# Altium PCB Mother_board00.PcbDoc
Units mm, origin at the board's own origin, x right, y up, seen from the top; angles counter-clockwise.
Board outline 169.08 x 144.64 mm, 2 copper layers (Top Layer, Bottom Layer); 57 components, 65 nets, 313 pads, 0 vias.
Unrouted connection lines stored in the file: 88.
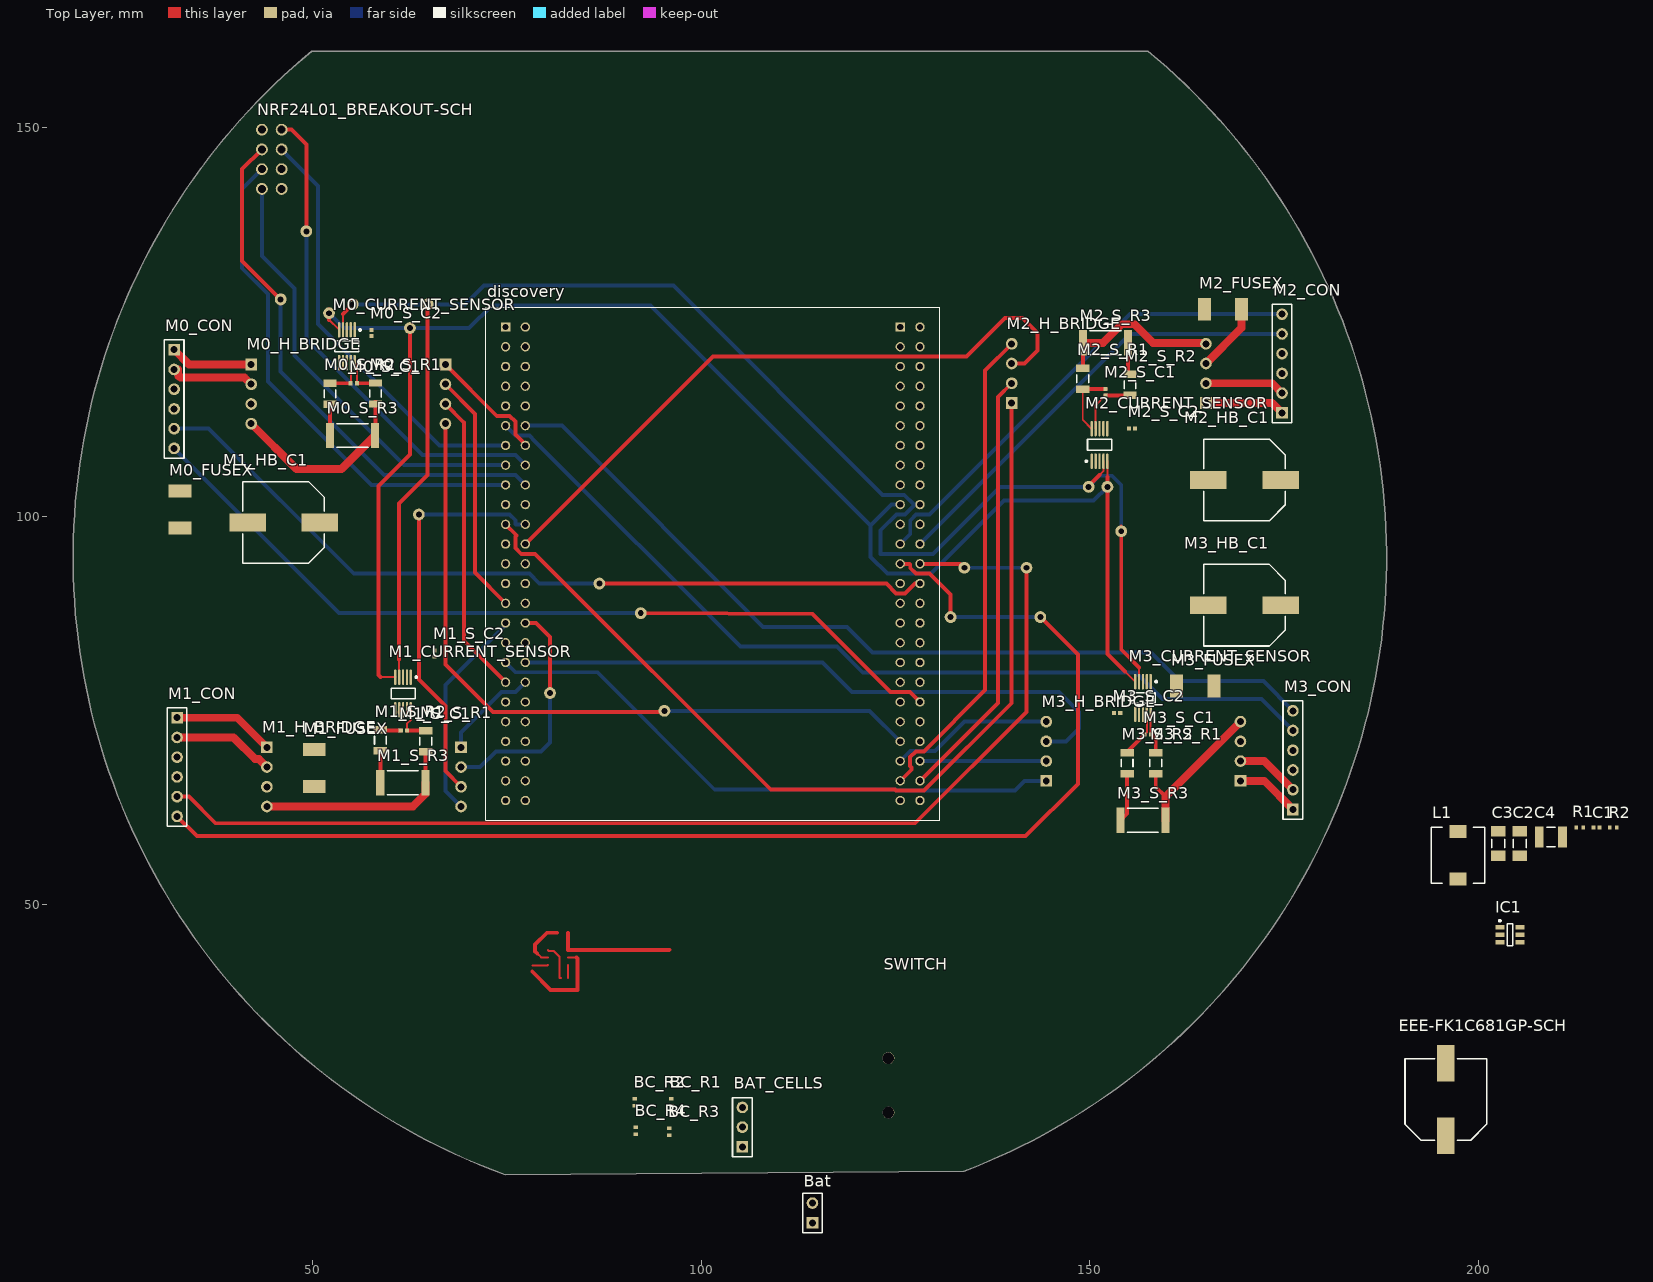
[diagram p0: Top Layer view]
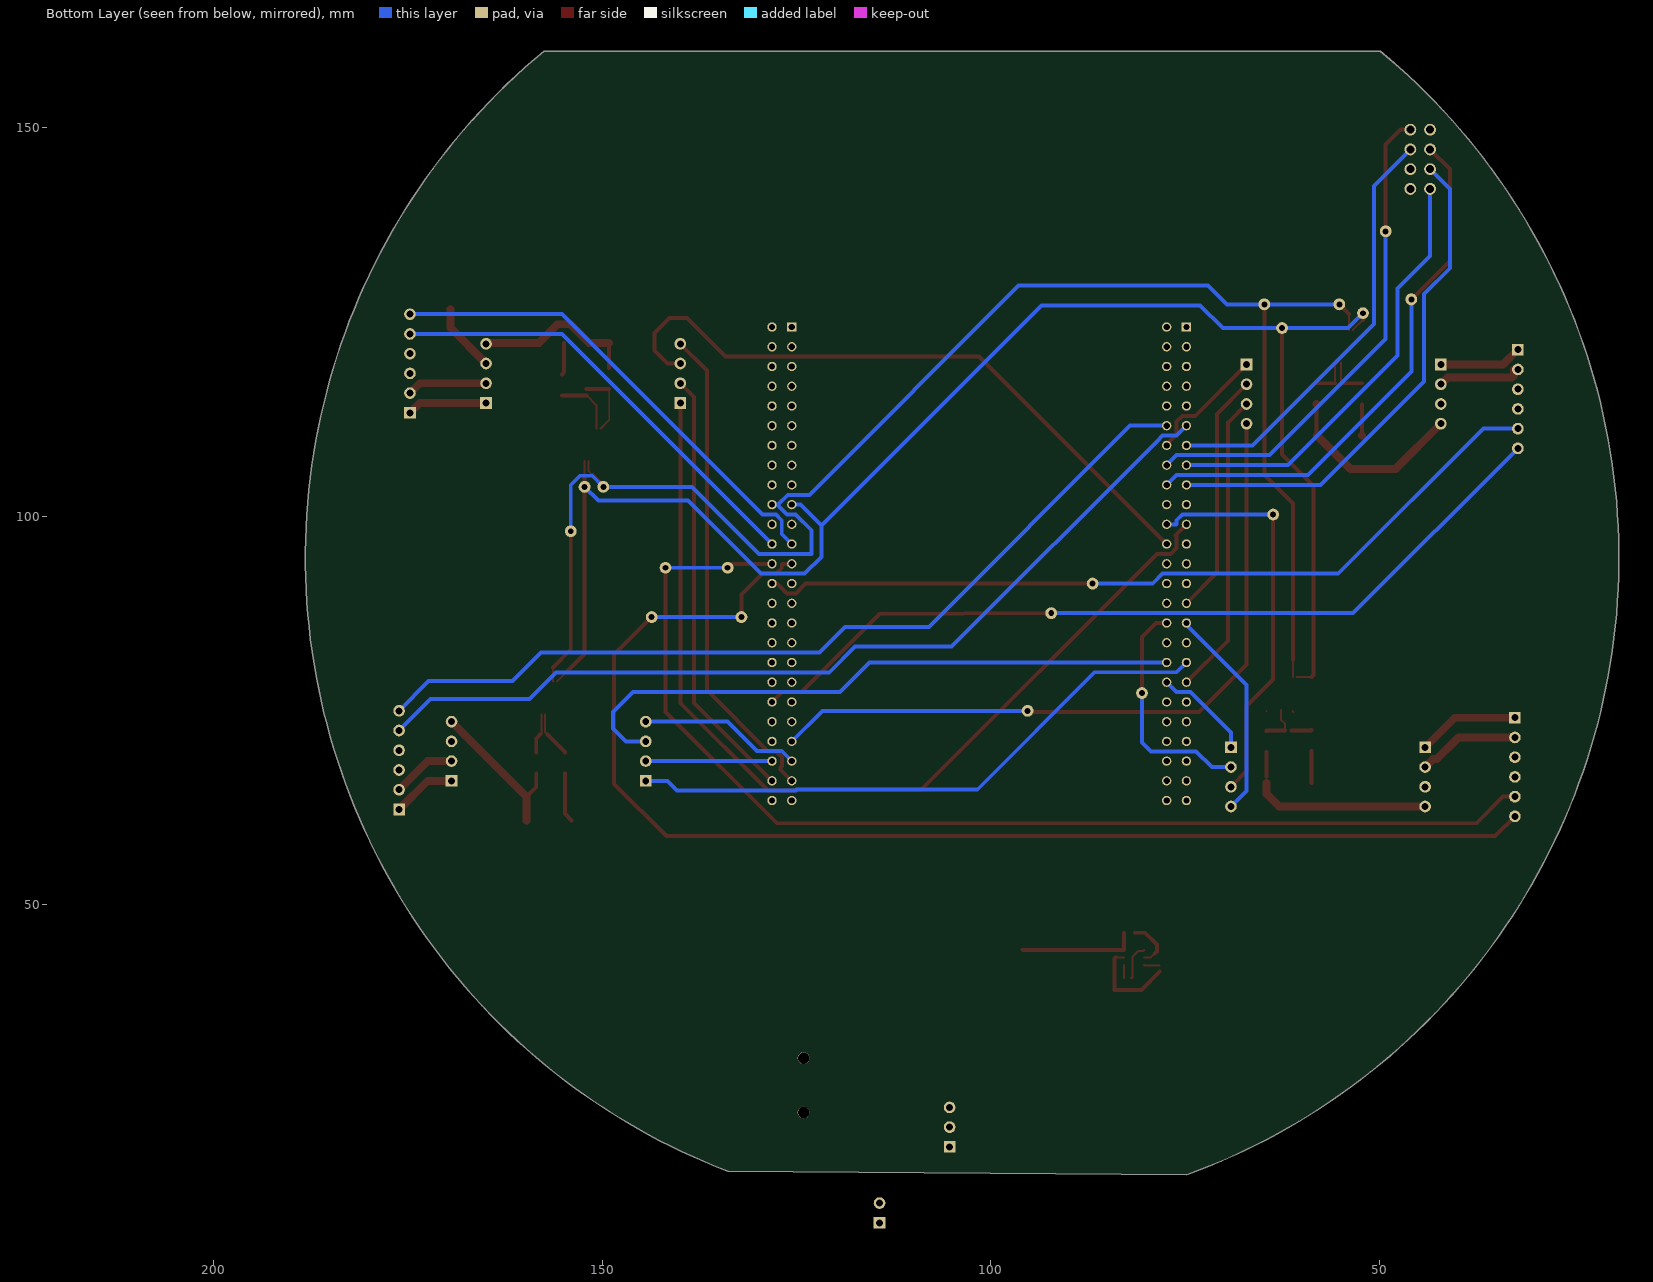
[diagram p1: Bottom Layer view, seen from below]

## Layer stack, top to bottom
Top Solder: solder mask 0.0102, Solder Resist, Dk 3.5
Top Layer: signal copper 0.0356
Dielectric 1: dielectric 0.32, FR-4, Dk 4.8
Bottom Layer: signal copper 0.0356
Bottom Solder: solder mask 0.0102, Solder Resist, Dk 3.5

## Board outline
74.759,15.203 cw(c103.671,94.651) 49.846,159.848 157.496,159.848 cw(c103.671,94.651) 133.831,15.669

## Design rules (kind name [scope] priority, off if disabled: settings)
Clearance Clearance_1 [All] p1: gap=0.4
PolygonConnect "Schematic Polygon Connect Style_3" [InComponent('C2')] p1: connectstyle=Direct reliefconductorwidth=0.254 reliefentries=4 polygonreliefangle="45 Angle" airgapwidth=0.254
PolygonConnect "Schematic Polygon Connect Style_2" [InComponent('C3')] p2: connectstyle=Direct reliefconductorwidth=0.254 reliefentries=4 polygonreliefangle="45 Angle" airgapwidth=0.254
PolygonConnect "Schematic Polygon Connect Style" [InComponent('L1')] p3: connectstyle=Direct reliefconductorwidth=0.254 reliefentries=4 polygonreliefangle="45 Angle" airgapwidth=0.254
PolygonConnect [All] p4: connectstyle=Relief reliefconductorwidth=0.254 reliefentries=4 polygonreliefangle="90 Angle" airgapwidth=0.254
RoutingVias [All] p1: holewidth=0.711 width=1.27 viastyle="Through Hole" minholewidth=0.711 minwidth=1.27 maxholewidth=0.711 maxwidth=1.27
SolderMaskExpansion [All] p1: expansion=0.102
Width [All] p1: maxlimit=1.016 minlimit=0.254 preferedwidth=0.508
30 further rules are at their usual default settings.

## Classes and differential pairs
component class Mother_board1: discovery
component class Mother_board2: EEE-FK1C681GP-SCH M0_CON M0_CURRENT_SENSOR M0_FUSEX M0_H_BRIDGE M0_S_C1 M0_S_C2 M0_S_R1 M0_S_R2 M0_S_R3 M1_CON M1_CURRENT_SENSOR M1_FUSEX M1_H_BRIDGE M1_HB_C1 M1_S_C1 M1_S_C2 M1_S_R1 M1_S_R2 M1_S_R3 M2_CON M2_CURRENT_SENSOR M2_FUSEX M2_H_BRIDGE M2_HB_C1 M2_S_C1 M2_S_C2 M2_S_R1 M2_S_R2 M2_S_R3 M3_CON M3_CURRENT_SENSOR M3_FUSEX M3_H_BRIDGE M3_HB_C1 M3_S_C1 M3_S_C2 M3_S_R1 M3_S_R2 M3_S_R3
component class Mother_board3: Bat BAT_CELLS BC_R1 BC_R2 BC_R3 BC_R4 C1 C2 C3 C4 IC1 L1 R1 R2 SWITCH
component class Mother_board4: NRF24L01_BREAKOUT-SCH
net class DIRECT: NetC1_2

## Components (designator, comment, footprint, x,y, rotation, side; value= is the part's Value field where it differs from the comment)
Bat "Battery connector" HDR1X2 114.3,9.017 r90 top
BAT_CELLS "Battery cells connector" HDR1X3 105.283,18.796 r90 top
BC_R1 "R0402-10K" 0402-RES-HD 96.139,24.569 r270 top
BC_R2 "R0402-10K" 0402-RES-HD 91.44,24.569 r90 top
BC_R3 "R0402-10K" 0402-RES-HD 95.885,20.77 r90 top
BC_R4 "R0402-10K" 0402-RES-HD 91.567,20.897 r90 top
C1 "100nF" 0402-CAP 215.229,59.9 r0 top
C2 "22uF" 1206-CAP 205.355,57.85 r90 top
C3 "22uF" 1206-CAP 202.597,57.85 r90 top
C4 "10uF" PCBComponent#1 209.363,58.7 r0 top
discovery "STM32F407G-DISC1" PCBComponent#2 101.473,93.853 r0 top
EEE-FK1C681GP-SCH "680UF/16V" EEE-FK1C681GP 195.834,24.892 r90 top
IC1 "TPS563200DDCT" SOT95P280X110-6N 204.089,46.101 r0 top
L1 "CLF7045T-4R7N-H" CLF7045T 197.383,56.323 r0 top
M0_CON "Header 6" HDR1X6 32.131,121.412 r270 top
M0_CURRENT_SENSOR "INA220BIDGST" TSSOP10 54.372,121.861 r270 top
M0_FUSEX "MF-MSMF250/16X" RESC4632X16N 32.893,100.861 r90 top
M0_H_BRIDGE "H_BRIDGE_BREAKOUT" H_BRIDGE_BREAKOUT 54.864,115.57 r180 top
M0_S_C1 "CC0402-1uF" 0402-CAP 55.264,117.094 r180 top
M0_S_C2 "CC0402-100nF" 0402-CAP 57.531,123.552 r90 top
M0_S_R1 "R1206-10R" 1206-RES-HD 58.039,115.777 r270 top
M0_S_R2 "R1206-10R" 1206-RES-HD 52.197,115.744 r270 top
M0_S_R3 "R2512-0R02" 2512-RES-HD 55.097,110.363 r0 top
M1_CON "Header 6" HDR1X6 32.512,74.041 r270 top
M1_CURRENT_SENSOR "INA220BIDGST" TSSOP10 61.603,77.157 r270 top
M1_FUSEX "MF-MSMF250/16X" RESC4632X16N 50.165,67.564 r270 top
M1_H_BRIDGE "H_BRIDGE_BREAKOUT" H_BRIDGE_BREAKOUT 56.877,66.294 r180 top
M1_HB_C1 "680UF/16V" EEE-FK1C681GP 46.228,99.187 r180 top
M1_S_C1 "CC0402-1uF" 0402-CAP 61.703,72.39 r180 top
M1_S_C2 "CC0402-100nF" 0402-CAP 65.659,82.315 r90 top
M1_S_R1 "R1206-10R" 1206-RES-HD 64.516,70.993 r270 top
M1_S_R2 "R1206-10R" 1206-RES-HD 58.674,71.12 r90 top
M1_S_R3 "R2512-0R02" 2512-RES-HD 61.574,65.659 r0 top
M2_CON "Header 6" HDR1X6 174.752,113.284 r90 top
M2_CURRENT_SENSOR "INA220BIDGST" TSSOP10 151.257,109.161 r90 top
M2_FUSEX "MF-MSMF250/16X" RESC4632X16N 167.155,126.619 r0 top
M2_H_BRIDGE "H_BRIDGE_BREAKOUT" H_BRIDGE_BREAKOUT 152.146,118.491 r0 top
M2_HB_C1 "680UF/16V" EEE-FK1C681GP 169.926,104.648 r180 top
M2_S_C1 "CC0402-1uF" 0402-CAP 152.019,115.932 r270 top
M2_S_C2 "CC0402-100nF" 0402-CAP 155.429,111.252 r0 top
M2_S_R1 "R1206-10R" 1206-RES-HD 149.098,117.682 r90 top
M2_S_R2 "R1206-10R" 1206-RES-HD 155.194,116.887 r90 top
M2_S_R3 "R2512-0R02" 2512-RES-HD 152.019,122.301 r180 top
M3_CON "Header 6" HDR1X6 176.149,62.23 r90 top
M3_CURRENT_SENSOR "INA220BIDGST" TSSOP10 156.845,76.581 r270 top
M3_FUSEX "MF-MSMF250/16X" RESC4632X16N 163.576,78.105 r0 top
M3_H_BRIDGE "H_BRIDGE_BREAKOUT" H_BRIDGE_BREAKOUT 156.591,69.85 r0 top
M3_HB_C1 "680UF/16V" EEE-FK1C681GP 169.926,88.519 r180 top
M3_S_C1 "CC0402-1uF" 0402-CAP 157.461,71.882 r180 top
M3_S_C2 "CC0402-100nF" 0402-CAP 153.524,74.676 r180 top
M3_S_R1 "R1206-10R" 1206-RES-HD 158.496,68.199 r270 top
M3_S_R2 "R1206-10R" 1206-RES-HD 154.813,68.199 r270 top
M3_S_R3 "R2512-0R02" 2512-RES-HD 156.845,60.833 r0 top
NRF24L01_BREAKOUT-SCH "NRF24l01_BREAKOUT-SCH" NRF24L01_BREAKOUT-PCB 45.974,144.653 r270 top
R1 "33K" 0402-RES-HD 213.071,59.9 r180 top
R2 "10K" 0402-RES-HD 217.387,59.9 r0 top
SWITCH "R1966AB" PCBComponent#3 134.62,29.591 r0 top

## Footprints (in the part's own frame and the unit in brackets; to place one, negate y for a bottom-side part, rotate by r counter-clockwise, add the part's x,y. Pads: shape width x height; smd on the part's side, far side on the other; paste and mask are expansions set on the pad)
0402-CAP [mm] "Chip Capacitor, Body 1.0x0.5mm, Height 0.6mm, IPC Medium Density"
  rect 0.52x0.52 smd: 1(-0.4,0) 2(0.4,0)
  body extent -0.55,-0.3 0.55,0.3, height 0.33
0402-RES-HD [mm] "Chip Resistor, Body 1.0x0.5mm, IPC High Density"
  rect 0.45x0.55 smd: 1(-0.45,0) 2(0.45,0)
  body extent -0.52,-0.27 0.53,0.28, height 0.4
1206-CAP [mm] "Chip Capacitor, Body 3.2x1.6mm, Height 1.7mm, IPC Low Density"
  rect 1.35x1.9 smd: 1(-1.6,0) 2(1.6,0)
  silkscreen extent -0.55,-0.85 0.55,0.85, body extent -1.7,-0.9 1.7,0.9, height 1.7
1206-RES-HD [mm] "Chip Resistor, Body 3.2x1.6mm, IPC High Density"
  rect 0.95x1.7 smd: 1(-1.35,0) 2(1.35,0)
  silkscreen extent -0.5,-0.75 0.5,0.75, body extent -1.67,-0.87 1.67,0.87, height 0.75
2512-RES-HD [mm] "Chip Resistor, Body 6.4x3.2mm, IPC High Density"
  rect 1.05x3.25 smd: 1(-2.9,0) 2(2.9,0)
  silkscreen extent -2,-1.52 2,1.53, body extent -3.25,-1.7 3.25,1.7, height 0.75
CLF7045T [mm]
  rect 2.2x1.7 smd: 1(0,3.05) 2(0,-3.05)
  silkscreen extent -3.45,-3.6 3.45,3.6, body extent -3.5,-3.6 3.5,3.6, height 4.51
EEE-FK1C681GP [mm] "Aluminum Electrolytic Capacitor, Body 10,30x10,30x10,50mm, IPC Low Density"
  rect 4.7x2.3 smd: 1(-4.65,0) 2(4.65,0)
  silkscreen extent -5.25,-5.25 5.25,5.25, body extent -5.25,-5.25 5.25,5.25, height 10.5
H_BRIDGE_BREAKOUT [mm]
  round 1.5 hole 0.9: 0(-12.192,3.683) 1(-12.192,1.143) 2(-12.192,-1.397) 4(12.808,3.683) 5(12.808,1.143) 6(12.808,-1.397)
  rect 1.5x1.5 hole 0.9: 3(-12.192,-3.937) 7(12.808,-3.937)
HDR1X2 [mm] "Connector; Header; 2 Position"
  rect 1.5x1.5 hole 0.9: 1(0,0)
  round 1.5 hole 0.9: 2(2.54,0)
  silkscreen extent -1.27,-1.27 3.81,1.27
HDR1X3 [mm] "Connector; Header; 3 Position"
  rect 1.5x1.5 hole 0.9: 1(0,0)
  round 1.5 hole 0.9: 2(2.54,0) 3(5.08,0)
  silkscreen extent -1.27,-1.27 6.35,1.27
HDR1X6 [mm] "Connector; Header; 6 Position"
  rect 1.5x1.5 hole 0.9: 1(0,0)
  round 1.5 hole 0.9: 2(2.54,0) 3(5.08,0) 4(7.62,0) 5(10.16,0) 6(12.7,0)
  silkscreen extent -1.27,-1.27 13.97,1.27
NRF24L01_BREAKOUT-PCB [mil]
  round 60 hole 40.16: 0(100,0) 1(0,0) 2(-100,0) 3(-200,0) 4(100,-100) 5(0,-100) 6(-100,-100) 7(-200,-100)
PCBComponent#1 [mm]
  rect 1.15x2.7 smd: 1(-1.5,0) 2(1.5,0)
  silkscreen extent -0.55,-1.25 0.55,1.25, body extent -1.7,-1.4 1.7,1.4, height 2.8
PCBComponent#2 [mm]
  rect 1.2x1.2 hole 0.8: P$1(-26.67,30.48) P$51(24.13,30.48)
  round 1.2 hole 0.8: P$2(-24.13,30.48) P$3(-26.67,27.94) P$4(-24.13,27.94) P$5(-26.67,25.4) P$6(-24.13,25.4) P$7(-26.67,22.86) P$8(-24.13,22.86) P$9(-26.67,20.32) P$10(-24.13,20.32) P$11(-26.67,17.78) P$12(-24.13,17.78) P$13(-26.67,15.24) P$14(-24.13,15.24) P$15(-26.67,12.7) P$16(-24.13,12.7) P$17(-26.67,10.16) P$18(-24.13,10.16) P$19(-26.67,7.62) P$20(-24.13,7.62) P$21(-26.67,5.08) P$22(-24.13,5.08) P$23(-26.67,2.54) P$24(-24.13,2.54) P$25(-26.67,0) P$26(-24.13,0) P$27(-26.67,-2.54) P$28(-24.13,-2.54) P$29(-26.67,-5.08) P$30(-24.13,-5.08) P$31(-26.67,-7.62) P$32(-24.13,-7.62) P$33(-26.67,-10.16) P$34(-24.13,-10.16) P$35(-26.67,-12.7) P$36(-24.13,-12.7) P$37(-26.67,-15.24) P$38(-24.13,-15.24) P$39(-26.67,-17.78) P$40(-24.13,-17.78) P$41(-26.67,-20.32) P$42(-24.13,-20.32) P$43(-26.67,-22.86) P$44(-24.13,-22.86) P$45(-26.67,-25.4) P$46(-24.13,-25.4) P$47(-26.67,-27.94) P$48(-24.13,-27.94) P$49(-26.67,-30.48) P$50(-24.13,-30.48) P$52(26.67,30.48) P$53(24.13,27.94) P$54(26.67,27.94) P$55(24.13,25.4) P$56(26.67,25.4) P$57(24.13,22.86) P$58(26.67,22.86) P$59(24.13,20.32) P$60(26.67,20.32) P$61(24.13,17.78) P$62(26.67,17.78) P$63(24.13,15.24) P$64(26.67,15.24) P$65(24.13,12.7) P$66(26.67,12.7) P$67(24.13,10.16) P$68(26.67,10.16) P$69(24.13,7.62) P$70(26.67,7.62) P$71(24.13,5.08) P$72(26.67,5.08) P$73(24.13,2.54) P$74(26.67,2.54) P$75(24.13,0) P$76(26.67,0) P$77(24.13,-2.54) P$78(26.67,-2.54) P$79(24.13,-5.08) P$80(26.67,-5.08) P$81(24.13,-7.62) P$82(26.67,-7.62) P$83(24.13,-10.16) P$84(26.67,-10.16) P$85(24.13,-12.7) P$86(26.67,-12.7) P$87(24.13,-15.24) P$88(26.67,-15.24) P$89(24.13,-17.78) P$90(26.67,-17.78) P$91(24.13,-20.32) P$92(26.67,-20.32) P$93(24.13,-22.86) P$94(26.67,-22.86) P$95(24.13,-25.4) P$96(26.67,-25.4) P$97(24.13,-27.94) P$98(26.67,-27.94) P$99(24.13,-30.48) P$100(26.67,-30.48)
  silkscreen extent -29.21,-33.02 29.21,33.02
PCBComponent#3 [mm]
  round 1.524 hole 1.5 paste+0: 0(-10.541,-6.375)
  round 1.524 hole 1.5: 1(-10.541,0.625)
  body extent -11.13,-9.71 11.37,11.23, height 7.4
RESC4632X16N [mm] "Chip Resistor, 2-Leads, Body 4,60x3,24mm, IPC Medium Density"
  rect 1.68x2.95 smd: 1(-2.39,0) 2(2.39,0)
  body extent -2.3,-1.62 2.3,1.62, height 1.15
SOT95P280X110-6N [mm] "SOT23, 6-Leads, Body 2,90x2,80mm, Pitch 0,95mm, IPC Medium Density"
  rect 1.15x0.6 smd: 1(-1.3,0.95) 2(-1.3,0) 3(-1.3,-0.95) 4(1.3,-0.95) 5(1.3,0) 6(1.3,0.95)
  silkscreen extent -1.42,-1.4 0.35,1.92, body extent -0.72,-1.37 0.72,1.38, height 1.1
TSSOP10 [mm] "TSSOP, 10-Leads, Body 3x3mm, Pitch 0.5mm, IPC Low Density"
  oval 2x0.3 smd: 1(-2.1,1) 2(-2.1,0.5) 3(-2.1,0) 4(-2.1,-0.5) 5(-2.1,-1) 6(2.1,-1) 7(2.1,-0.5) 8(2.1,0) 9(2.1,0.5) 10(2.1,1)
  silkscreen extent -2.22,-1.55 0.7,1.83, body extent -1.55,-1.55 1.55,1.55, height 1.1

## Part data
Bat: library part "Header 2", "Header, 2-Pin"
BAT_CELLS: library part "Header 3", "Header, 3-Pin"
BC_R1 BC_R2 BC_R3 BC_R4 R2: library part R0402-10K-10, "RES 10K OHM 1/10W 1% 0402 SMD"
C1: library part CC0402-100nF-50v-A.3, "CAP CER 0.1UF 50V 10% X7R 0402"
C2 C3: library part CC1206-22uF-6.3V-1, "CAP CER 22UF 6.3V 20% X5R 1206"
C4: library part CC1210-10uF-2, "CAP CER 10UF 50V 20% X5R 1210"
discovery: library part "BREAKOUT STM32F4DISCOVERY-01.A.1", "EVAL KIT STM32F DISCOVERY"
EEE-FK1C681GP-SCH M1_HB_C1 M2_HB_C1 M3_HB_C1: library part EEE-FK1C681GP-SCH, "Aluminum Electrolytic Capacitors - SMD Al Lytic Cap SMT FK Series 105C"
IC1: library part TPS563200DDCT-01.A.2, "IC REG BUCK ADJ 3A SYNC 6SOT"
L1: library part CLF7045T-4R7N-H-2, "FIXED IND 4.7UH 4.1A 20 MOHM SMD"
M0_CON M1_CON M2_CON M3_CON: "Header, 6-Pin"
M0_CURRENT_SENSOR M1_CURRENT_SENSOR M2_CURRENT_SENSOR M3_CURRENT_SENSOR: library part INA220BIDGST-3, "IC MONITOR PWR/CURR BIDIR 10MSOP"
M0_FUSEX M1_FUSEX M2_FUSEX M3_FUSEX: library part MF-MSMF250/16X-01.A.1, "PTC RESETTABLE .30A 30V 1812"
M0_H_BRIDGE M1_H_BRIDGE M2_H_BRIDGE M3_H_BRIDGE: library part H_BRIDGE_BREAKOUT-SCH
M0_S_C1 M1_S_C1 M2_S_C1 M3_S_C1: library part CC0402-1uF-5, "CAP CER 1UF 6.3V 10% X5R 0402"
M0_S_C2 M1_S_C2 M2_S_C2 M3_S_C2: library part CC0402-100nF-A.12, "CAP CER 0.1UF 10V 20% X5R 0402"
M0_S_R1 M0_S_R2 M1_S_R1 M1_S_R2 M2_S_R1 M2_S_R2 M3_S_R1 M3_S_R2: library part R1206-10R-1, "RES SMD 10 OHM 5% 2/3W 1206"
M0_S_R3 M1_S_R3 M2_S_R3 M3_S_R3: library part R2512-0R02-4, "RES .02 OHM 2W 1% 2512 SMD"
R1: library part R0402-33K-7, "RES 33K OHM 1/10W 1% 0402 SMD"
SWITCH: library part "E-Switch R1966ABLKBLKFR-01.A.2", "SWITCH ROCKER SPST 15A 125V"

## Free pads (board coordinates)
  round 1.524 hole 0.762: 3(152.273,103.759) 5(149.86,103.759) 18(154.051,98.044) 19(86.868,91.313) 21(95.25,74.93) 22(63.627,100.197) 24(80.518,77.216) 25(92.202,87.503) 26(143.637,86.995) 29(132.08,86.995) 30(141.859,93.345) 31(133.858,93.345) 34(52.07,126.111) 35(55.118,127.254) 38(64.77,127.254) 39(62.484,124.206) 40(45.847,127.889) 41(49.149,136.652)

## Nets (pads, with @x,y where several pads share a name; then routed paths per layer and width w, separated by ;. In a path a pad name is that pad's centre, name@x,y a point inside that pad or via, vN(x,y) a via of type N, cw(c..) or ccw(c..) an arc to the next point about the centre after c; other vN are vias at no path point)
GND: Bat.1 BAT_CELLS.3 BC_R3.2 BC_R4.1 C2.1 C3.1 C4.1 discovery.P$1 discovery.P$2 discovery.P$51 discovery.P$52 EEE-FK1C681GP-SCH.2 IC1.1 M0_CON.3 M0_CURRENT_SENSOR.1 M0_CURRENT_SENSOR.2 M0_CURRENT_SENSOR.7 M0_S_C2.2 M0_S_R2.2 M0_S_R3.1 M1_CON.3 M1_CURRENT_SENSOR.2 M1_CURRENT_SENSOR.7 M1_HB_C1.1 M1_S_C2.2 M1_S_R2.2 M1_S_R3.1 M2_CON.3 M2_CURRENT_SENSOR.1 M2_CURRENT_SENSOR.7 M2_HB_C1.1 M2_S_C2.2 M2_S_R2.2 M2_S_R3.1 M3_CON.3 M3_CURRENT_SENSOR.7 M3_HB_C1.1 M3_S_C2.2 M3_S_R2.2 M3_S_R3.1 NRF24L01_BREAKOUT-SCH.0 R2.1 | length 18.7
  Top Layer w0.508: M0_S_R3.1 M0_S_R2.2 ; M1_S_R3.1 58.674,69.77 ; M3_S_R3.1 154.813,61.701 M3_S_R2.2 ; M2_S_R3.1 154.919,118.512 M2_S_R2.2
NetBAT_CELLS_1: BAT_CELLS.1 BC_R2.1
NetBAT_CELLS_2: BAT_CELLS.2 BC_R1.1
NetBC_R1_2: BC_R1.2 BC_R3.1 discovery.P$8
NetBC_R2_2: BC_R2.2 BC_R4.2 discovery.P$7
NetC1_2: C1.2 IC1.2 L1.1
NetC4_2: C4.2 EEE-FK1C681GP-SCH.1 IC1.3 M0_CURRENT_SENSOR.8 M0_FUSEX.1 M1_CURRENT_SENSOR.8 M1_FUSEX.1 M2_CURRENT_SENSOR.8 M2_FUSEX.1 M3_CURRENT_SENSOR.8 M3_FUSEX.1 | length 15.3
  Top Layer w0.508: 82.804,46.355 82.834,46.325 82.834,44.13 95.843,44.13 95.885,44.172
Netdiscovery_P$11: discovery.P$11 M3_CON.5 | length 117.6
  Bottom Layer w0.508: discovery.P$11 76.089,110.347 76.099,110.357 77.867,110.357 78.607,109.617 78.607,109.602 105.025,83.185 117.475,83.185 120.777,79.883 155.956,79.883 159.385,76.454 172.085,76.454 M3_CON.5
Netdiscovery_P$12: discovery.P$12 M3_CON.6 | length 114
  Bottom Layer w0.508: discovery.P$12 82.042,111.633 107.95,85.725 118.745,85.725 122.047,82.423 157.861,82.423 161.544,78.74 172.339,78.74 M3_CON.6
Netdiscovery_P$13: discovery.P$13 NRF24L01_BREAKOUT-SCH.2 | length 55
  Bottom Layer w0.508: NRF24L01_BREAKOUT-SCH.2 50.654,142.513 50.654,124.733 66.294,109.093 discovery.P$13
Netdiscovery_P$14: discovery.P$14 M0_H_BRIDGE.3 | length 15.6
  Top Layer w0.508: M0_H_BRIDGE.3 73.666,112.897 75.327,112.897 76.067,112.157 76.067,110.496 77.343,109.22 discovery.P$14
Netdiscovery_P$15: discovery.P$15 NRF24L01_BREAKOUT-SCH.4 | length 56.2
  Bottom Layer w0.508: NRF24L01_BREAKOUT-SCH.4 43.434,133.477 47.625,129.286 47.625,120.65 61.722,106.553 discovery.P$15
Netdiscovery_P$16: discovery.P$16 NRF24L01_BREAKOUT-SCH.3 pad.41 | length 64.4
  Top Layer w0.508: NRF24L01_BREAKOUT-SCH.3 47.244,149.733 49.149,147.828 pad.41
  Bottom Layer w0.508: pad.41@49.149,137.16 pad.41 49.149,122.809 64.119,107.839 76.057,107.839 discovery.P$16
Netdiscovery_P$17: discovery.P$17 NRF24L01_BREAKOUT-SCH.5 | length 65.9
  Bottom Layer w0.508: NRF24L01_BREAKOUT-SCH.5 40.894,142.113 40.894,131.902 44.196,128.6 44.196,117.348 57.531,104.013 discovery.P$17
Netdiscovery_P$18: discovery.P$18 NRF24L01_BREAKOUT-SCH.6 pad.40 | length 69.7
  Top Layer w0.508: NRF24L01_BREAKOUT-SCH.6 40.894,144.653 40.894,132.842 pad.40
  Bottom Layer w0.508: pad.40@45.847,128.397 pad.40 45.847,118.618 59.166,105.299 76.057,105.299 discovery.P$18
Netdiscovery_P$21: discovery.P$21 M2_H_BRIDGE.3 | length 123.8
  Top Layer w0.508: discovery.P$21 76.235,97.501 76.079,97.345 76.079,95.869 76.819,95.129 78.607,95.129 108.931,64.805 124.938,64.805 ; 124.93,64.798 125.079,64.649 128.667,64.649 139.954,75.936 M2_H_BRIDGE.3
Netdiscovery_P$22: discovery.P$22 M1_H_BRIDGE.1 pad.22 | length 52.3
  Top Layer w0.508: pad.22 63.671,100.153 63.671,78.95 67.056,75.565 67.056,67.164 M1_H_BRIDGE.1
  Bottom Layer w0.508: pad.22@63.125,100.197 pad.22 75.327,100.197 76.067,99.457 76.067,99.001 76.135,98.933 discovery.P$22
Netdiscovery_P$24: discovery.P$24 M2_H_BRIDGE.1 | length 85
  Top Layer w0.508: discovery.P$24 101.473,120.523 134.112,120.523 139.065,125.476 141.351,125.476 143.256,123.571 143.256,121.285 141.605,119.634 M2_H_BRIDGE.1
Netdiscovery_P$29: discovery.P$29 M0_H_BRIDGE.2 | length 31.4
  Top Layer w0.508: M0_H_BRIDGE.2 70.866,113.157 70.866,92.71 discovery.P$29
Netdiscovery_P$31: discovery.P$31 M1_H_BRIDGE.0 | length 27.7
  Bottom Layer w0.508: M1_H_BRIDGE.0 67.056,64.624 67.056,78.232 74.803,85.979 discovery.P$31
Netdiscovery_P$32: discovery.P$32 M1_H_BRIDGE.2 pad.24 | length 30.8
  Top Layer w0.508: discovery.P$32 78.74,86.233 80.518,84.455 pad.24 pad.24@80.518,76.708
  Bottom Layer w0.508: M1_H_BRIDGE.2 71.513,67.691 73.539,69.717 79.369,69.717 80.518,70.866 pad.24
Netdiscovery_P$35: discovery.P$35 M3_H_BRIDGE.3 | length 76.9
  Bottom Layer w0.508: discovery.P$35 76.067,79.889 86.608,79.889 101.727,64.77 124.972,64.77 125.084,64.659 140.351,64.659 141.605,65.913 M3_H_BRIDGE.3
Netdiscovery_P$36: discovery.P$36 M3_H_BRIDGE.1 | length 80.9
  Bottom Layer w0.508: discovery.P$36 115.57,81.153 119.38,77.343 146.05,77.343 148.59,74.803 148.59,72.644 146.939,70.993 M3_H_BRIDGE.1
Netdiscovery_P$37: discovery.P$37 M0_H_BRIDGE.1 | length 39
  Top Layer w0.508: M0_H_BRIDGE.1 69.469,112.014 69.469,83.947 discovery.P$37
Netdiscovery_P$38: discovery.P$38 M1_H_BRIDGE.3 | length 12.9
  Bottom Layer w0.508: M1_H_BRIDGE.3 69.069,72.127 74.279,77.337 76.067,77.337 discovery.P$38
Netdiscovery_P$69: discovery.P$69 M0_CURRENT_SENSOR.5 M1_CURRENT_SENSOR.5 M2_CURRENT_SENSOR.5 M3_CURRENT_SENSOR.5 pad.3 pad.34 pad.39 | length 209.9
  Top Layer w0.254: 52.07,125.263 M0_CURRENT_SENSOR.5 ; 58.674,79.257 M1_CURRENT_SENSOR.5 ; 152.257,105.045 M2_CURRENT_SENSOR.5 ; 154.516,80.01 M3_CURRENT_SENSOR.5
  Top Layer w0.508: 52.07,125.263 pad.34 pad.34@52.07,126.619 ; 58.674,79.257 58.42,79.511 58.42,103.886 62.484,107.95 pad.39 ; pad.3@152.257,104.029 152.257,105.045 ; pad.3 152.273,82.253 154.516,80.01
  Bottom Layer w0.508: pad.34 53.975,124.206 70.104,124.206 73.025,127.127 93.472,127.127 121.793,98.806 ; discovery.P$69 124.46,101.473 121.793,98.806 ; pad.3 150.495,101.981 138.938,101.981 129.54,92.583 123.952,92.583 121.793,94.742 121.793,98.806
Netdiscovery_P$70: discovery.P$70 M0_CURRENT_SENSOR.4 M1_CURRENT_SENSOR.4 M2_CURRENT_SENSOR.4 M3_CURRENT_SENSOR.4 pad.5 pad.18 pad.35 pad.38 | length 214.8
  Top Layer w0.254: M0_CURRENT_SENSOR.4 53.872,125.984 ; M1_CURRENT_SENSOR.4 61.103,81.534 ; 151.257,105.283 151.757,105.783 M2_CURRENT_SENSOR.4 ; M3_CURRENT_SENSOR.4 156.345,80.51
  Top Layer w0.508: 53.872,125.984 53.872,126.008 pad.35 pad.35@55.499,127.635 ; 61.103,81.534 61.103,101.616 64.77,105.283 pad.38@64.77,127.127 ; pad.5@150.114,103.759 150.114,104.14 151.257,105.283 ; pad.18@154.051,98.679 pad.18 154.051,82.804 156.345,80.51
  Bottom Layer w0.508: pad.35 69.596,127.254 72.009,129.667 96.393,129.667 123.333,102.727 126.122,102.727 127.377,101.473 127.508,101.473 ; discovery.P$70 127.508,101.473 ; pad.18 154.051,103.998 152.864,105.185 151.286,105.185 pad.5 138.43,103.759 129.794,95.123 123.063,95.123 123.063,98.171 125.095,100.203 126.238,100.203 127.508,101.473
Netdiscovery_P$73: discovery.P$73 M2_CON.6 | length 62.4
  Bottom Layer w0.508: discovery.P$73 126.889,97.679 126.889,99.452 127.624,100.187 129.397,100.187 155.194,125.984 M2_CON.6
Netdiscovery_P$74: discovery.P$74 M2_CON.5 | length 57.8
  Bottom Layer w0.508: discovery.P$74 155.194,123.444 M2_CON.5
Netdiscovery_P$75: discovery.P$75 M1_CON.6 pad.26 pad.29 | length 166.6
  Top Layer w0.508: M1_CON.6 35.052,58.801 141.732,58.801 148.463,65.532 148.463,82.169 pad.26 ; discovery.P$75 126.811,93.853 126.889,93.775 126.889,93.334 127.624,92.599 129.397,92.599 132.08,89.916 pad.29
  Bottom Layer w0.508: pad.29@131.572,86.995 pad.29 pad.26
Netdiscovery_P$76: discovery.P$76 M1_CON.5 pad.30 pad.31 | length 150.2
  Top Layer w0.508: M1_CON.5 34.036,63.881 37.465,60.452 127.508,60.452 141.859,74.803 pad.30 pad.30@141.859,93.853 ; discovery.P$76 133.35,93.853 pad.31
  Bottom Layer w0.508: pad.31@133.35,93.345 pad.31 pad.30
Netdiscovery_P$78: discovery.P$78 M0_CON.5 pad.19 | length 105.3
  Top Layer w0.508: pad.19 123.815,91.313 125.079,90.049 126.232,90.049 127.496,91.313 discovery.P$78
  Bottom Layer w0.508: M0_CON.5 36.576,111.252 55.251,92.577 77.867,92.577 79.131,91.313 pad.19
Netdiscovery_P$90: discovery.P$90 M0_CON.6 pad.25 | length 109.6
  Top Layer w0.508: pad.25@92.596,87.508 114.294,87.393 124.339,77.349 126.867,77.349 discovery.P$90
  Bottom Layer w0.508: M0_CON.6 53.34,87.503 pad.25@92.71,87.503
Netdiscovery_P$93: discovery.P$93 M0_H_BRIDGE.0 pad.21 | length 93.8
  Top Layer w0.508: M0_H_BRIDGE.0 67.056,80.899 73.152,74.803 pad.21@95.377,74.803
  Bottom Layer w0.508: pad.21 121.666,74.93 discovery.P$93
Netdiscovery_P$95: discovery.P$95 M3_H_BRIDGE.0 | length 20.9
  Bottom Layer w0.508: discovery.P$95 126.889,69.739 130.064,69.739 133.858,73.533 M3_H_BRIDGE.0
Netdiscovery_P$96: discovery.P$96 M3_H_BRIDGE.2 | length 16.3
  Bottom Layer w0.508: discovery.P$96 M3_H_BRIDGE.2
Netdiscovery_P$97: discovery.P$97 M2_H_BRIDGE.0 | length 62.9
  Top Layer w0.508: discovery.P$97 127.035,67.345 127.035,67.642 126.879,67.798 126.879,68.977 127.619,69.717 128.655,69.717 136.525,77.587 136.525,118.745 M2_H_BRIDGE.0
Netdiscovery_P$98: discovery.P$98 M2_H_BRIDGE.2 | length 56.1
  Top Layer w0.508: discovery.P$98 138.176,75.946 138.176,115.316 M2_H_BRIDGE.2
NetIC1_4: IC1.4 R1.1 R2.2
NetM0_CON_1: M0_CON.1 M0_H_BRIDGE.7 | length 10.7
  Top Layer w1.016: M0_CON.1 34.036,119.507 M0_H_BRIDGE.7
NetM0_CON_2: M0_CON.2 M0_H_BRIDGE.6 | length 11.2
  Top Layer w1.016: M0_CON.2 32.668,118.872 32.668,117.99 32.818,117.99 32.959,117.849 41.174,117.849 M0_H_BRIDGE.6
NetM0_CURRENT_SENSOR_9: M0_CURRENT_SENSOR.9 M0_S_C1.2 M0_S_R2.1 | length 5.2
  Top Layer w0.254: M0_S_C1.2 54.872,117.102 M0_CURRENT_SENSOR.9
  Top Layer w0.508: M0_S_R2.1 M0_S_C1.2@54.75,117.094
NetM0_CURRENT_SENSOR_10: M0_CURRENT_SENSOR.10 M0_S_C1.1 M0_S_R1.1 | length 5.2
  Top Layer w0.254: M0_CURRENT_SENSOR.10 55.664,119.469 M0_S_C1.1
  Top Layer w0.508: M0_S_C1.1 58.006,117.094 M0_S_R1.1
NetM0_FUSEX_2: M0_FUSEX.2 M0_H_BRIDGE.5
NetM0_H_BRIDGE_4: M0_H_BRIDGE.4 M0_S_R1.2 M0_S_R3.2 | length 24.3
  Top Layer w0.508: M0_S_R3.2 58.039,110.405 M0_S_R1.2
  Top Layer w1.016: M0_H_BRIDGE.4 47.898,106.045 53.679,106.045 M0_S_R3.2 ; M0_S_R1.2@57.997,114.385 M0_S_R1.2
NetM1_CON_1: M1_CON.1 M1_H_BRIDGE.7 | length 13.1
  Top Layer w1.016: M1_CON.1 40.259,74.041 M1_H_BRIDGE.7
NetM1_CON_2: M1_CON.2 M1_H_BRIDGE.6 | length 13.1
  Top Layer w1.016: M1_CON.2 39.775,71.501 42.557,68.719 43.041,68.719 M1_H_BRIDGE.6
NetM1_CURRENT_SENSOR_9: M1_CURRENT_SENSOR.9 M1_S_C1.2 M1_S_R2.1 | length 2.7
  Top Layer w0.254: 64.469,74.93 64.516,74.883
  Top Layer w0.508: 58.674,72.47 58.754,72.39 M1_S_C1.2
NetM1_CURRENT_SENSOR_10: M1_CURRENT_SENSOR.10 M1_S_C1.1 M1_S_R1.1 | length 5.6
  Top Layer w0.254: 61.002,74.756 61.176,74.93 ; M1_S_C1.1 62.103,73.238 62.634,73.769 M1_CURRENT_SENSOR.10@62.634,75.057
  Top Layer w0.508: M1_S_C1.1 64.469,72.39 M1_S_R1.1
NetM1_FUSEX_2: M1_FUSEX.2 M1_H_BRIDGE.5
NetM1_H_BRIDGE_4: M1_H_BRIDGE.4 M1_S_R1.2 M1_S_R3.2 | length 25.7
  Top Layer w0.508: M1_S_R3.2@64.516,66.463 M1_S_R1.2
  Top Layer w1.016: M1_H_BRIDGE.4 62.863,62.611 64.474,64.222 M1_S_R3.2
NetM2_CON_1: M2_CON.1 M2_H_BRIDGE.7 | length 10.3
  Top Layer w1.016: M2_H_BRIDGE.7 173.482,114.554 M2_CON.1
NetM2_CON_2: M2_CON.2 M2_H_BRIDGE.6 | length 10.3
  Top Layer w1.016: M2_H_BRIDGE.6 173.482,117.094 M2_CON.2
NetM2_CURRENT_SENSOR_9: M2_CURRENT_SENSOR.9 M2_S_C1.2 M2_S_R2.1 | length 8
  Top Layer w0.254: M2_CURRENT_SENSOR.9 150.757,114.27 M2_S_C1.2
  Top Layer w0.508: M2_S_C1.2 152.024,115.537 M2_S_R2.1
NetM2_CURRENT_SENSOR_10: M2_CURRENT_SENSOR.10 M2_S_C1.1 M2_S_R1.1 | length 8.5
  Top Layer w0.254: M2_S_R1.1 149.098,112.389 M2_CURRENT_SENSOR.10@150.226,111.261
  Top Layer w0.508: M2_S_R1.1 M2_S_C1.1
NetM2_FUSEX_2: M2_FUSEX.2 M2_H_BRIDGE.5 | length 8.9
  Top Layer w1.016: M2_H_BRIDGE.5 169.545,124.225 M2_FUSEX.2
NetM2_H_BRIDGE_4: M2_H_BRIDGE.4 M2_S_R1.2 M2_S_R3.2 | length 21.1
  Top Layer w0.508: M2_S_R1.2 149.119,119.053 M2_S_R3.2
  Top Layer w1.016: M2_S_R3.2 151.691,122.301 154.078,124.688 155.76,124.688 158.147,122.301 164.827,122.301 M2_H_BRIDGE.4
NetM3_CON_1: M3_CON.1 M3_H_BRIDGE.7 | length 8.3
  Top Layer w1.016: M3_H_BRIDGE.7 172.466,65.913 M3_CON.1
NetM3_CON_2: M3_CON.2 M3_H_BRIDGE.6 | length 8.3
  Top Layer w1.016: M3_H_BRIDGE.6 172.466,68.453 M3_CON.2
NetM3_CURRENT_SENSOR_9: M3_CURRENT_SENSOR.9 M3_S_C1.2 M3_S_R2.1 | length 6
  Top Layer w0.254: M3_S_C1.2 157.345,72.166 M3_CURRENT_SENSOR.9
  Top Layer w0.508: M3_S_R2.1 154.813,69.634 M3_S_C1.2
NetM3_CURRENT_SENSOR_10: M3_CURRENT_SENSOR.10 M3_S_C1.1 M3_S_R1.1 | length 5.2
  Top Layer w0.254: M3_CURRENT_SENSOR.10 157.845,71.898 M3_S_C1.1
  Top Layer w0.508: M3_S_C1.1@157.985,71.882 158.496,71.371 M3_S_R1.1
NetM3_FUSEX_2: M3_FUSEX.2 M3_H_BRIDGE.5
NetM3_H_BRIDGE_4: M3_H_BRIDGE.4 M3_S_R1.2 M3_S_R3.2 | length 20.2
  Top Layer w0.508: M3_S_R1.2 158.496,65.128 159.745,63.879
  Top Layer w1.016: M3_S_R3.2 159.745,63.879 M3_H_BRIDGE.4
VCC: discovery.P$3 discovery.P$4 M0_CON.4 M0_CURRENT_SENSOR.6 M0_S_C2.1 M1_CON.4 M1_CURRENT_SENSOR.1 M1_CURRENT_SENSOR.6 M1_S_C2.1 M2_CON.4 M2_CURRENT_SENSOR.2 M2_CURRENT_SENSOR.6 M2_S_C2.1 M3_CON.4 M3_CURRENT_SENSOR.1 M3_CURRENT_SENSOR.2 M3_CURRENT_SENSOR.6 M3_S_C2.1 NRF24L01_BREAKOUT-SCH.1
VCC_3V3: C2.2 C3.2 L1.2 R1.2 | length 6.2
  Top Layer w0.254: 78.876,43.688 79.384,43.18 80.234,43.18
  Top Layer w0.508: 78.876,43.688 78.613,43.951 78.613,44.831 80.137,46.355 81.404,46.355
pads on no net: Bat.2 C1.1 discovery.P$5 discovery.P$6 discovery.P$9 discovery.P$10 discovery.P$19 discovery.P$20 discovery.P$23 discovery.P$25 discovery.P$26 discovery.P$27 discovery.P$28 discovery.P$30 discovery.P$33 discovery.P$34 discovery.P$39 discovery.P$40 discovery.P$41 discovery.P$42 discovery.P$43 discovery.P$44 discovery.P$45 discovery.P$46 discovery.P$47 discovery.P$48 discovery.P$49 discovery.P$50 discovery.P$53 discovery.P$54 discovery.P$55 discovery.P$56 discovery.P$57 discovery.P$58 discovery.P$59 discovery.P$60 discovery.P$61 discovery.P$62 discovery.P$63 discovery.P$64 discovery.P$65 discovery.P$66 discovery.P$67 discovery.P$68 discovery.P$71 discovery.P$72 discovery.P$77 discovery.P$79 discovery.P$80 discovery.P$81 discovery.P$82 discovery.P$83 discovery.P$84 discovery.P$85 discovery.P$86 discovery.P$87 discovery.P$88 discovery.P$89 discovery.P$91 discovery.P$92 discovery.P$94 discovery.P$99 discovery.P$100 IC1.5 IC1.6 M0_CURRENT_SENSOR.3 M1_CURRENT_SENSOR.3 M1_HB_C1.2 M2_CURRENT_SENSOR.3 M2_HB_C1.2 M3_CURRENT_SENSOR.3 M3_HB_C1.2 NRF24L01_BREAKOUT-SCH.7 SWITCH.0 SWITCH.1
copper on no net: | length 20.7
  Top Layer w0.254: 78.232,42.164 80.168,42.164 80.234,42.23 ; 80.234,44.13 80.357,44.007 81.027,44.007 81.732,43.302 81.732,40.513 81.904,40.513 ; 82.804,40.513 82.834,40.543 82.834,42.23 ; 82.834,43.18 83.947,43.18
  Top Layer w0.508: 78.232,41.364 80.596,39 84.063,39 84.063,43.064 83.947,43.18